# Altium PCB keyboard.PcbDoc
Units mm, origin at the board's own origin, x right, y up, seen from the top; angles counter-clockwise.
Board outline 152.4 x 101.6 mm, 4 copper layers (Top Layer, Inner, GND, Bottom Layer), stack 1.666 mm thick; 157 components, 115 nets, 357 pads, 0 vias.
Unrouted connection lines stored in the file: 243.
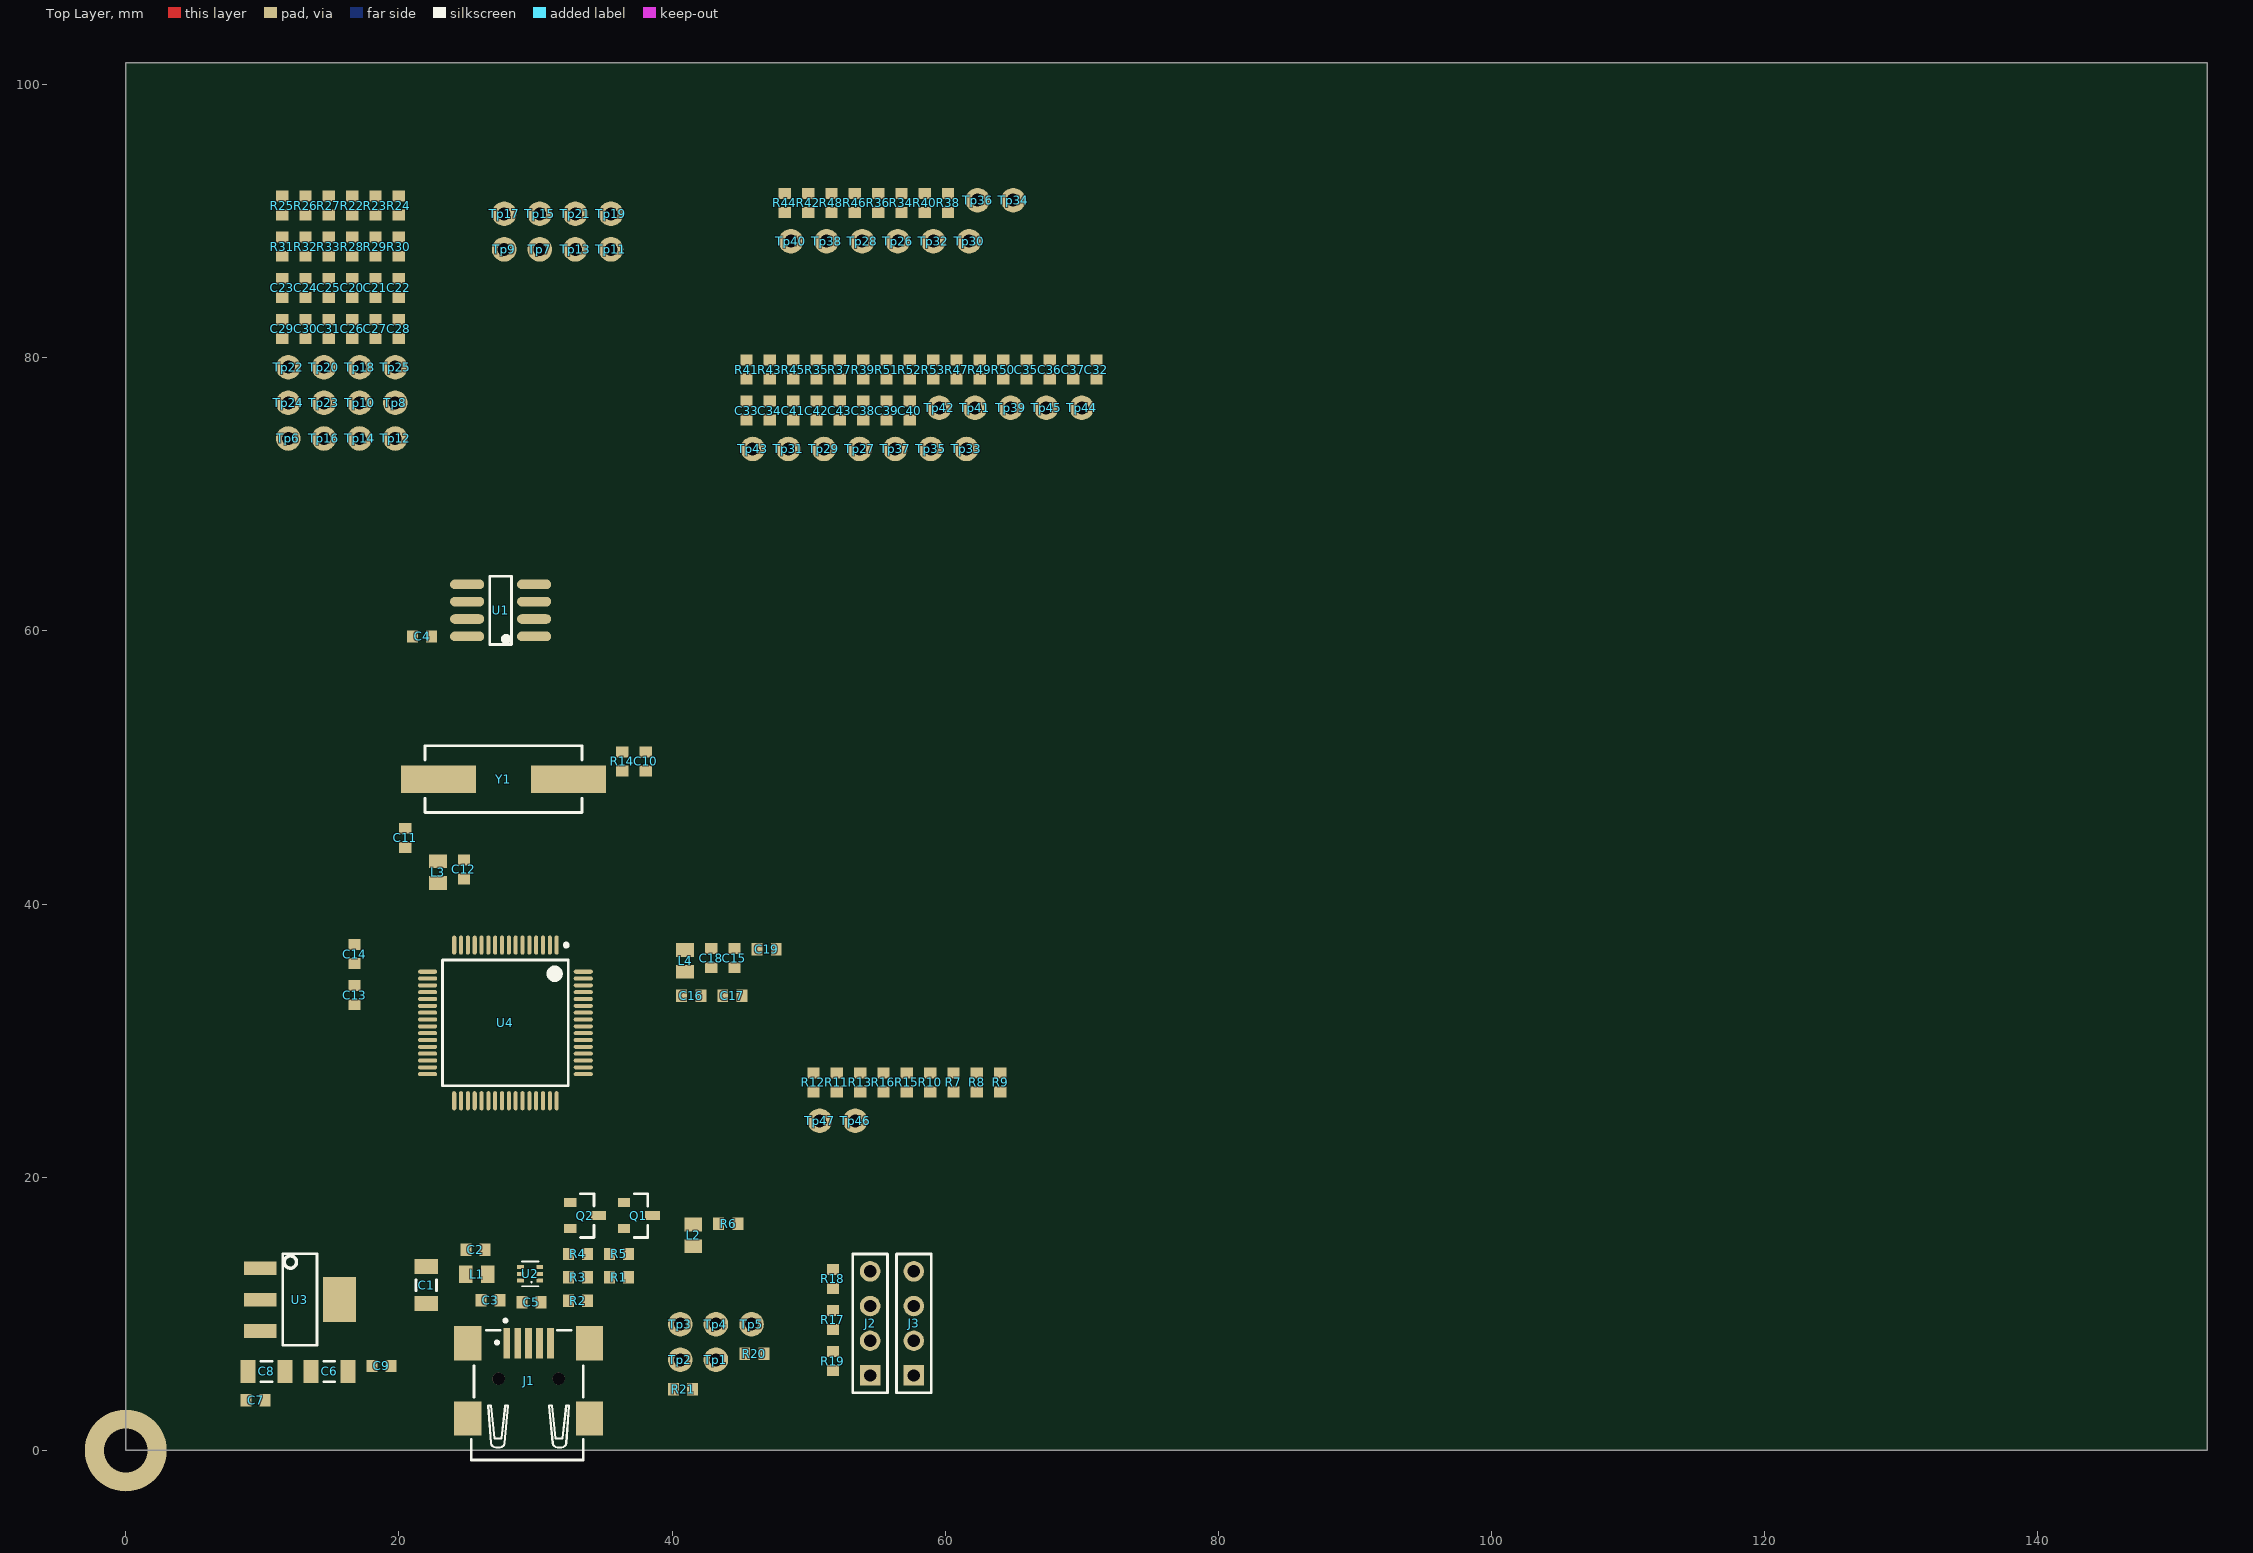
[diagram p0: Top Layer view]
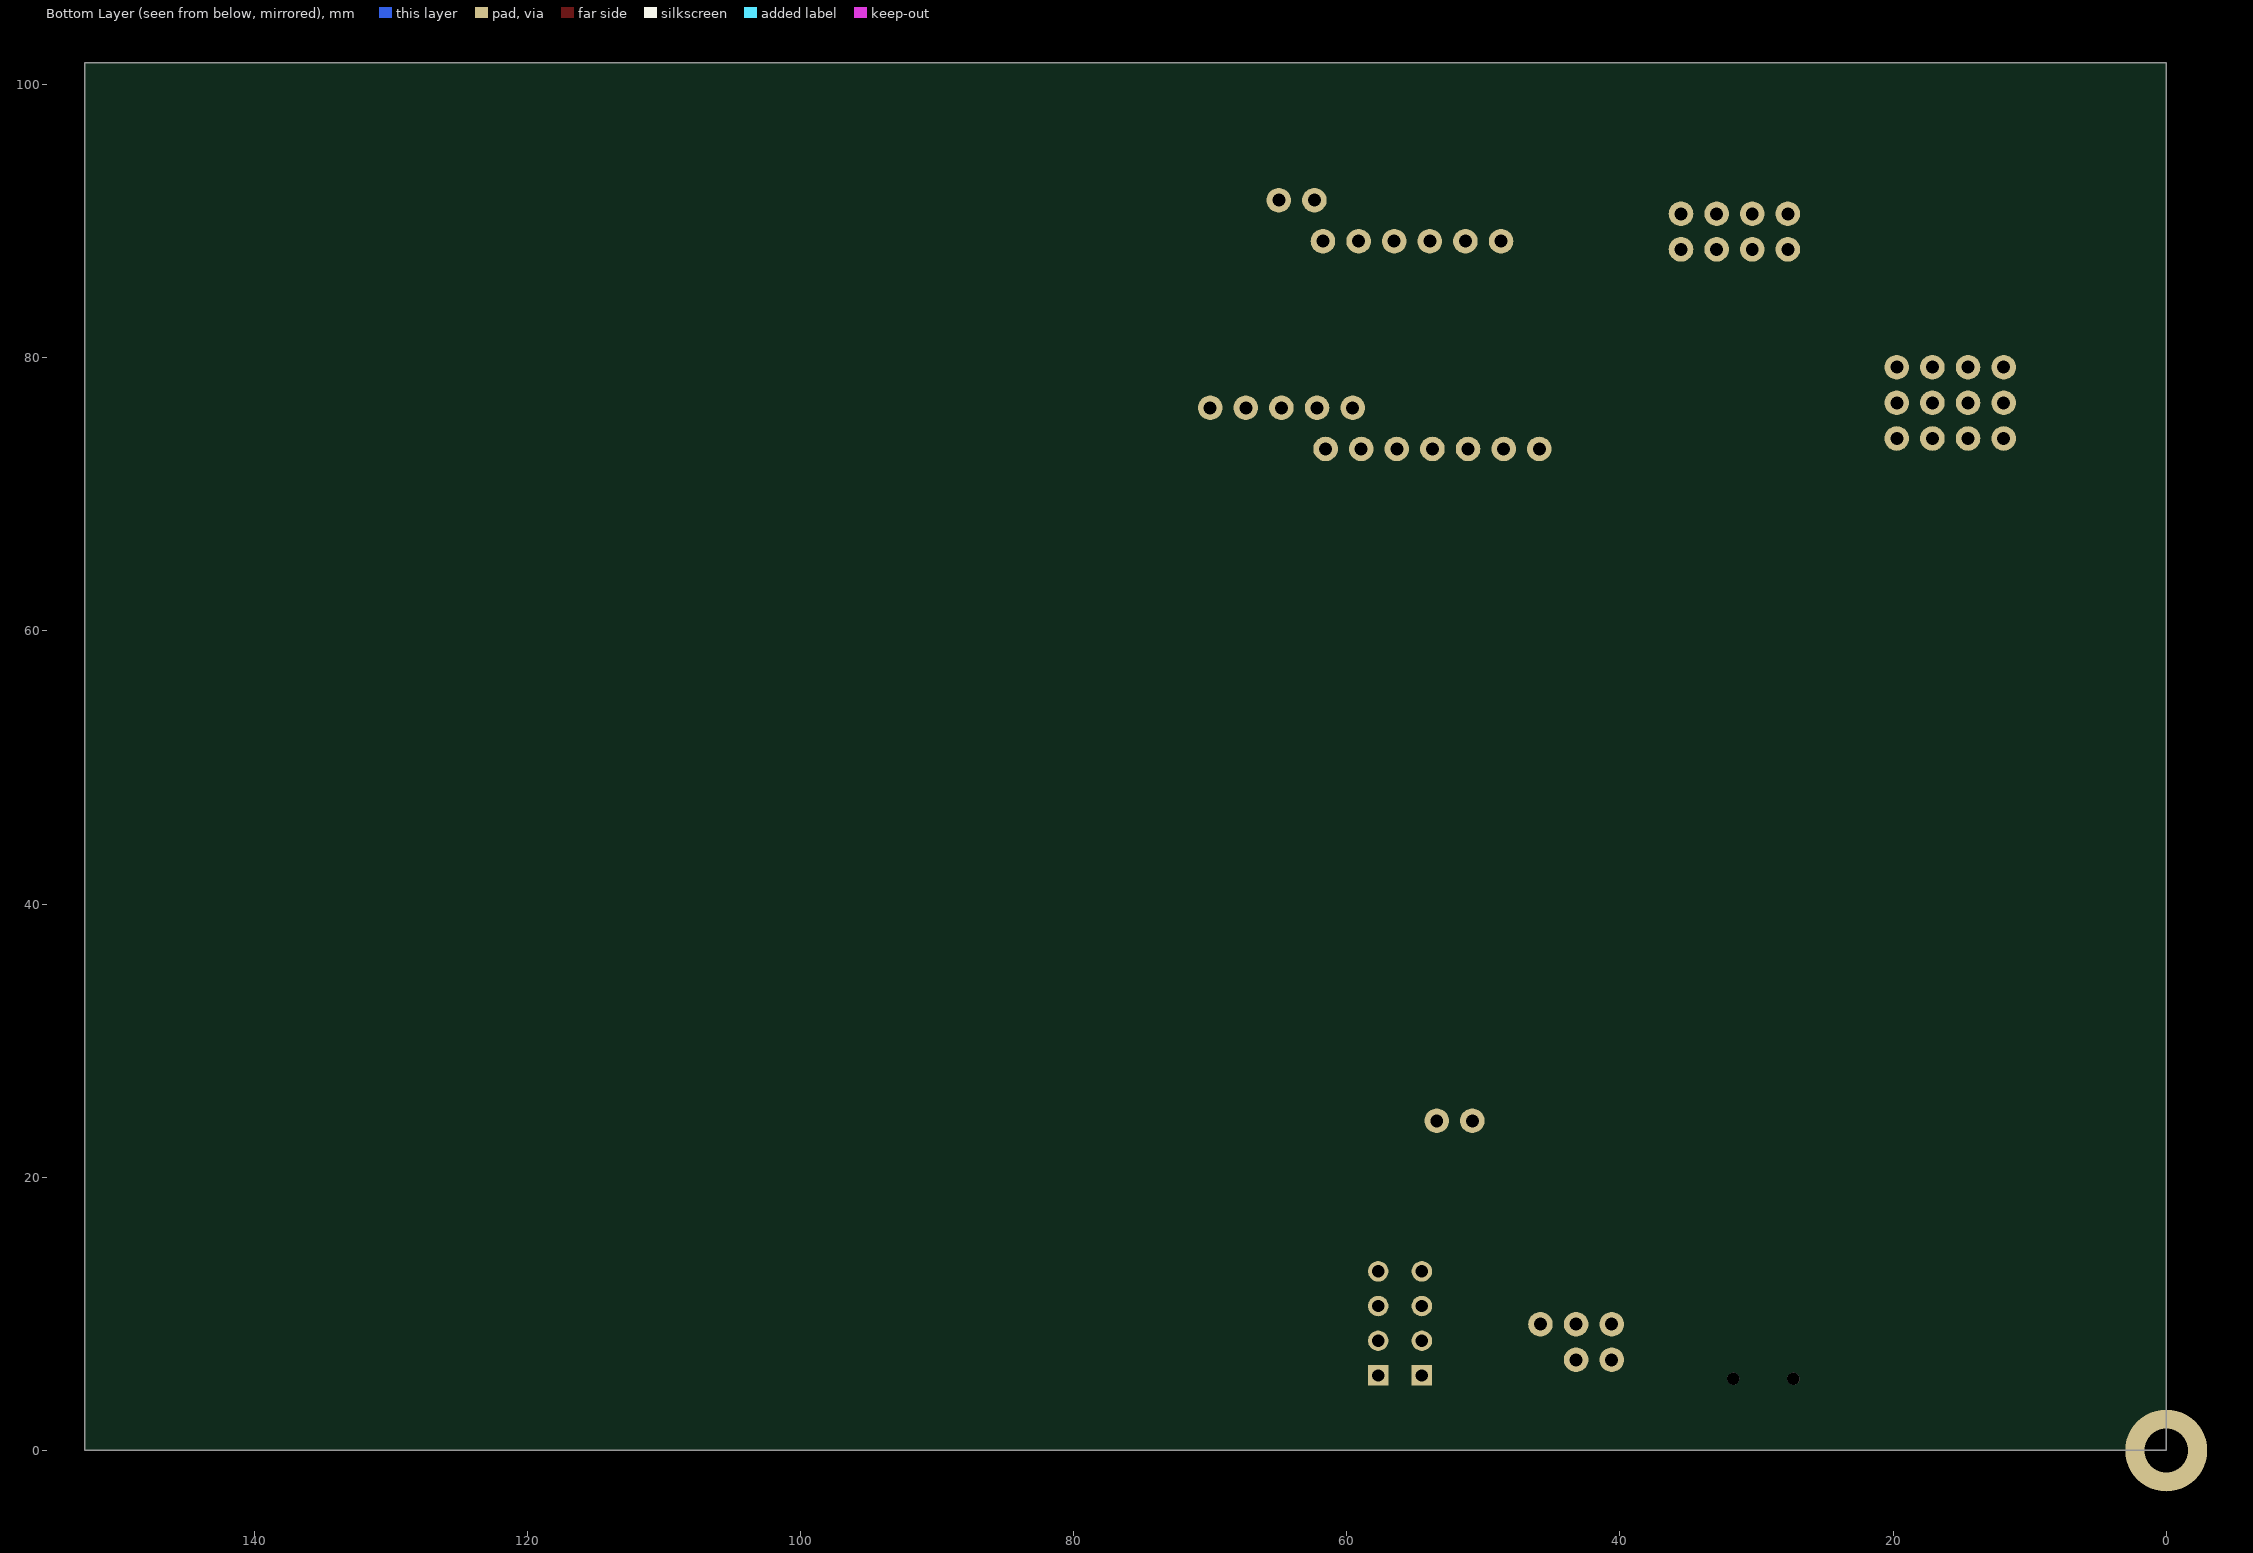
[diagram p1: Bottom Layer view, seen from below]
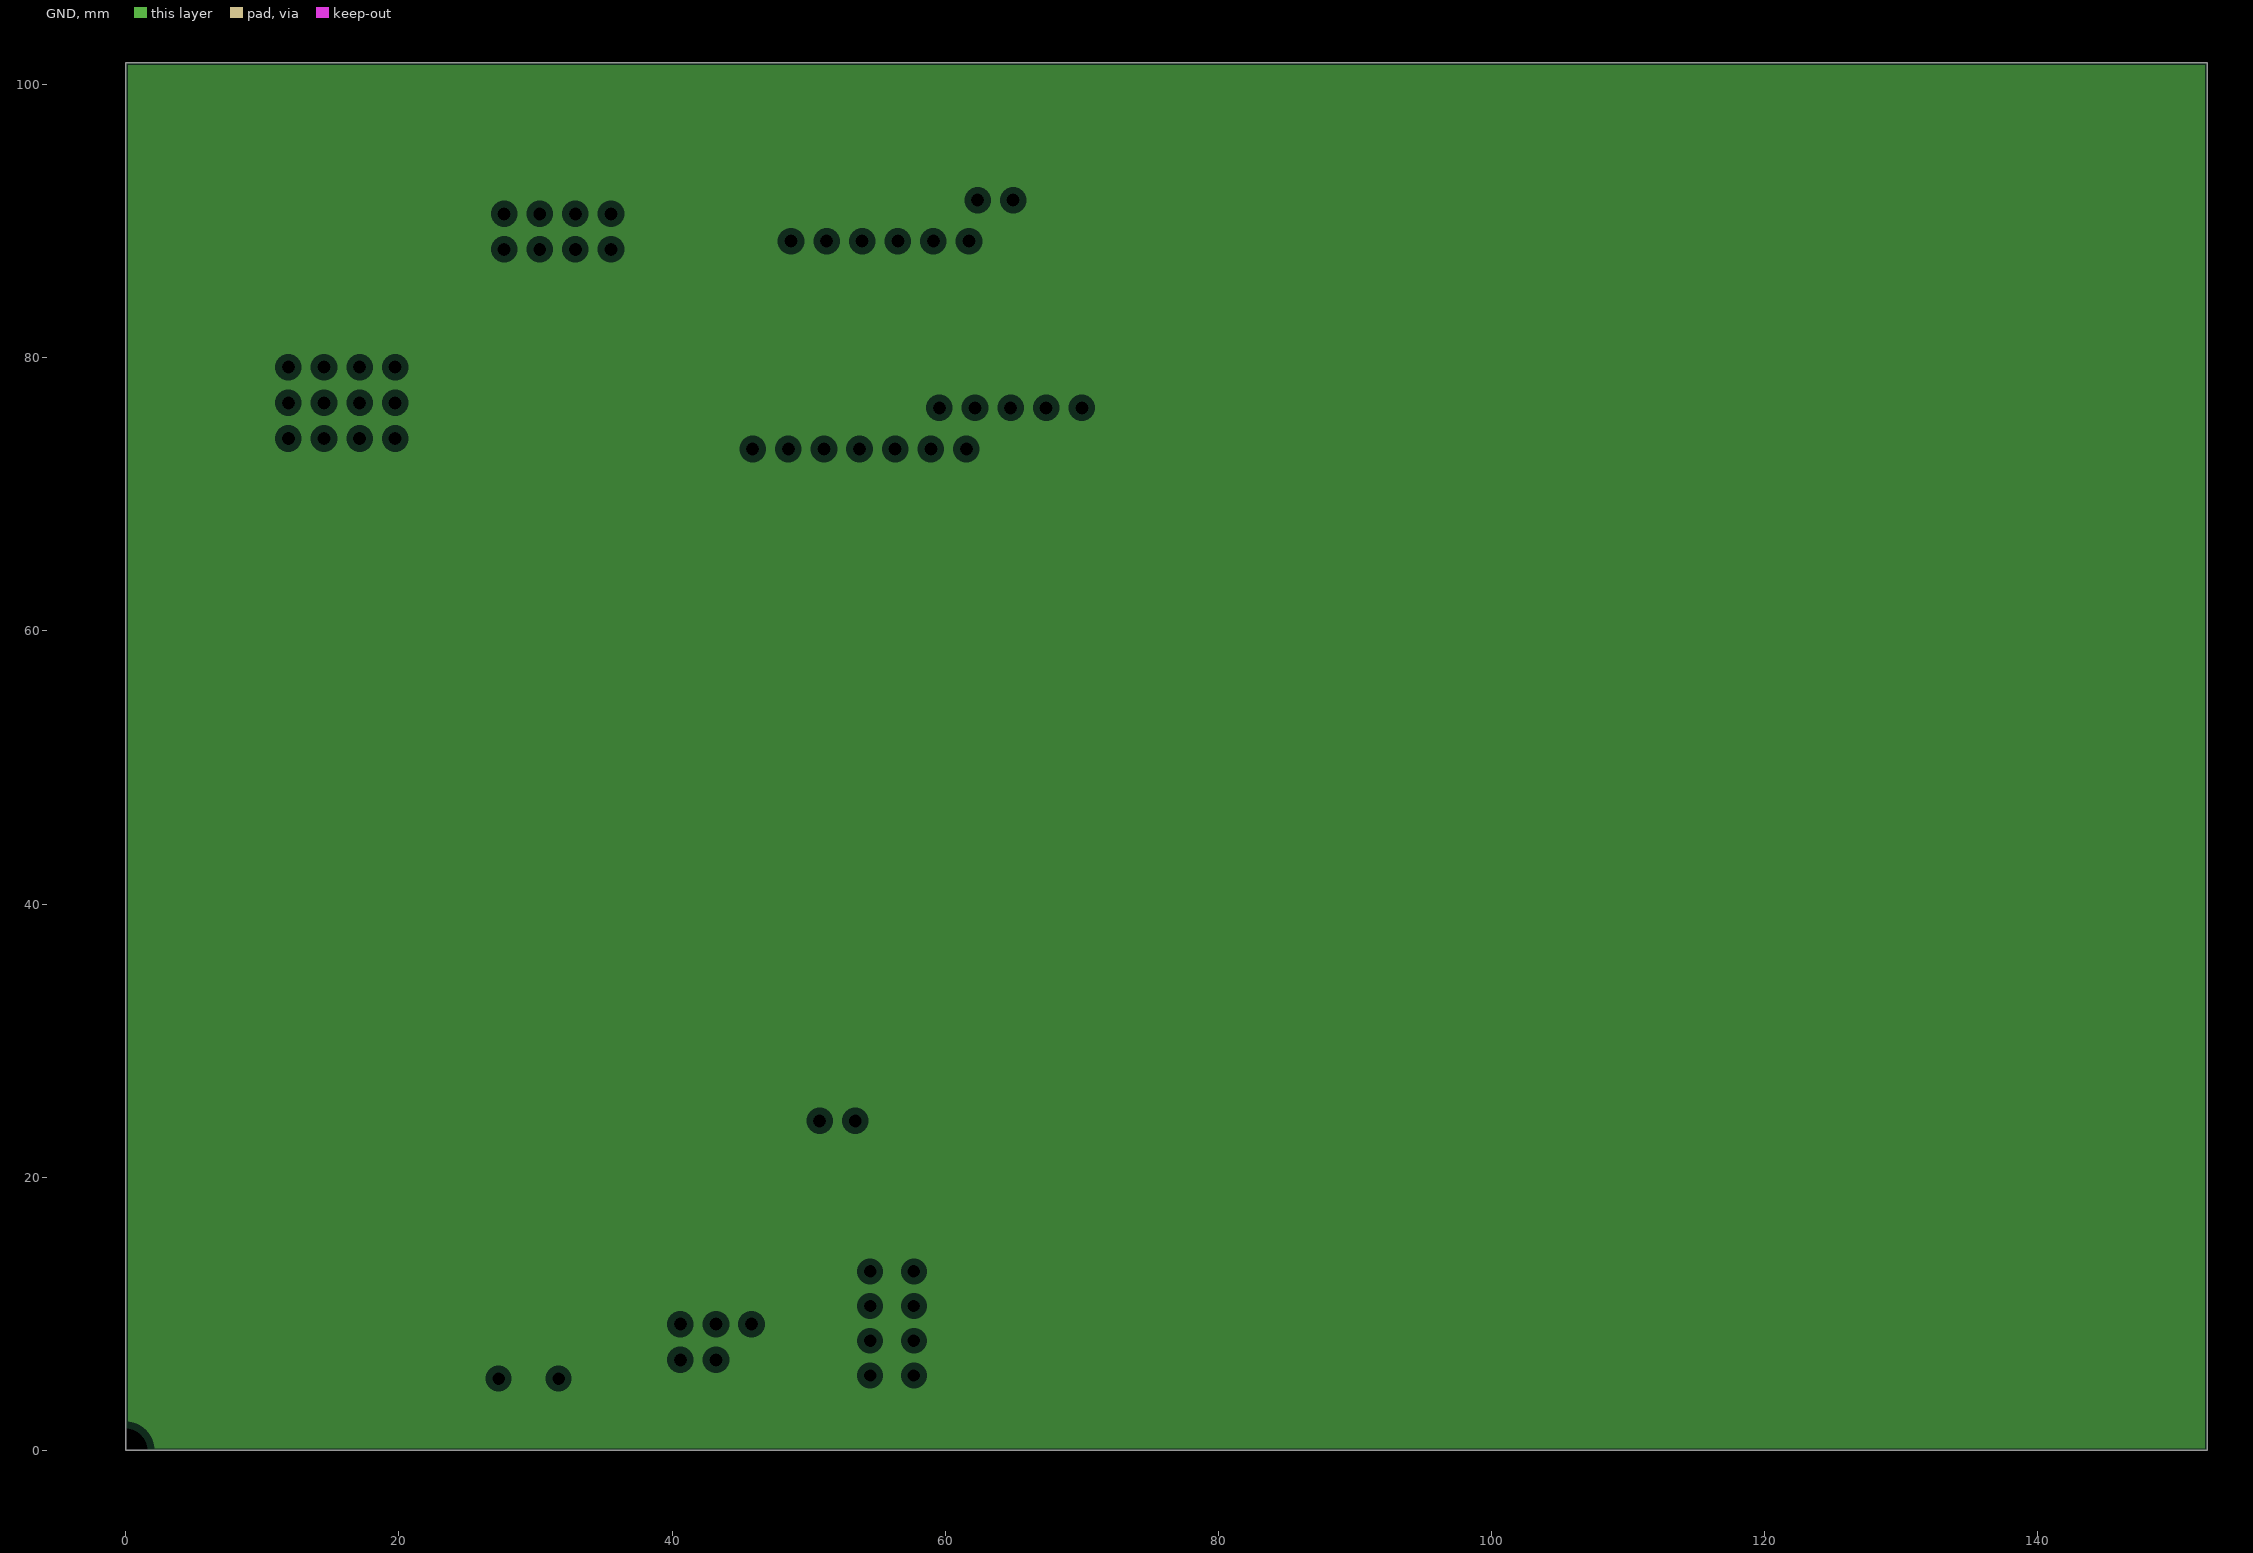
[diagram p2: GND, clearances drawn from the general rule]

## Layer stack, top to bottom
Top Solder: solder mask 0.0102, Solder Resist, Dk 3.5
Top Layer: signal copper 0.035
Dielectric1: prepreg 0.408, 2x7628, Dk 4.2
Inner: signal copper 0.035
Dielectric2: core 0.71, FR-4, Dk 4.2
GND: plane copper 0.035
Dielectric3: prepreg 0.408, 2x7628, Dk 4.2
Bottom Layer: signal copper 0.035
Bottom Solder: solder mask 0.0102, Solder Resist, Dk 3.5

## Board outline
0,0 152.4,0 152.4,101.6 0,101.6

## Design rules (kind name [scope] priority, off if disabled: settings)
Clearance Clearance_comp [InComponent('U4')] p1: gap=0.15
Clearance [All] p2: gap=0.25
DiffPairsRouting [All] p1: maxlimit=0.254 minlimit=0.254 mostfreqgap=0.254 toplayer_minwidth=0.381 toplayer_maxwidth=0.381 toplayer_prefwidth=0.381 midlayer2_minwidth=0.381 midlayer2_maxwidth=0.381 midlayer2_prefwidth=0.381 bottomlayer_minwidth=0.381 bottomlayer_maxwidth=0.381 bottomlayer_prefwidth=0.381 maxuncoupledlength=12.7
PlaneClearance [All] p1: clearance=0.5
PlaneConnect PlaneConnect_via [isvia] p1: planeconnectstyle=Direct reliefexpansion=0.508 reliefentries=4 reliefconductorwidth=0.254 reliefairgap=0.254
PlaneConnect [All] p2: planeconnectstyle=Relief reliefexpansion=0.508 reliefentries=4 reliefconductorwidth=0.254 reliefairgap=0.254
PolygonConnect PolygonConnect_via [isvia] p1: connectstyle=Direct reliefconductorwidth=0.254 reliefentries=4 polygonreliefangle="90 Angle" airgapwidth=0.254
PolygonConnect [All] p2: connectstyle=Relief reliefconductorwidth=0.254 reliefentries=4 polygonreliefangle="90 Angle" airgapwidth=0.254
RoutingVias [All] p1: holewidth=0.3 width=0.6 viastyle="Through Hole" minholewidth=0.2 minwidth=0.35 maxholewidth=0.5 maxwidth=1
SolderMaskExpansion SolderMaskExpansion_via [IsVia] p1: expansion=-10
SolderMaskExpansion [All] p2: expansion=0.1
Width [All] p1: maxlimit=5 minlimit=0.15 preferedwidth=0.25
27 further rules are at their usual default settings.

## Classes and differential pairs
net class usb_diff: USB_N USB_P
net class Power: +3.3V +5V VDD
differential pair USB: +USB_P -USB_N

## Components (designator, comment, footprint, x,y, rotation, side; value= is the part's Value field where it differs from the comment)
C1 "4.7uF" 1206_[3216] 22,12.1 r270 top
C2 "100nF" 0603_[1608] 25.6,14.7 r0 top
C3 "10nF" 0603_[1608] 26.7,11 r180 top
C4 "100nF" 0603_[1608] 21.7,59.6 r180 top
C5 "100nF" 0603_[1608] 29.704,10.857 r0 top
C6 "10uF" 1206_[3216] 14.912,5.784 r0 top
C7 "100nF" 0603_[1608] 9.504,3.676 r0 top
C8 "10uF" 1206_[3216] 10.304,5.784 r0 top
C9 "100nF" 0603_[1608] 18.72,6.184 r0 top
C10 "27pF" 0603_[1608] 38.07,50.442 r90 top
C11 "27pF" 0603_[1608] 20.454,44.854 r90 top
C12 "1uF" 0603_[1608] 24.762,42.542 r90 top
C13 "2.2uF" 0603_[1608] 16.754,33.334 r90 top
C14 "2.2uF" 0603_[1608] 16.754,36.342 r90 top
C15 "100nF" 0603_[1608] 44.57,36.042 r90 top
C16 "100nF" 0603_[1608] 41.404,33.284 r180 top
C17 "100nF" 0603_[1608] 44.412,33.284 r180 top
C18 "100nF" 0603_[1608] 42.862,36.042 r90 top
C19 "4.7uF" 0603_[1608] 46.928,36.692 r0 top
C20 "100nF" 0603_[1608] 16.578,85.126 r90 top
C21 "100nF" 0603_[1608] 18.286,85.126 r90 top
C22 "100nF" 0603_[1608] 19.994,85.126 r90 top
C23 "100nF" 0603_[1608] 11.454,85.126 r90 top
C24 "100nF" 0603_[1608] 13.162,85.126 r90 top
C25 "100nF" 0603_[1608] 14.87,85.126 r90 top
C26 "100nF" 0603_[1608] 16.578,82.117 r90 top
C27 "100nF" 0603_[1608] 18.286,82.117 r90 top
C28 "100nF" 0603_[1608] 19.994,82.117 r90 top
C29 "100nF" 0603_[1608] 11.454,82.117 r90 top
C30 "100nF" 0603_[1608] 13.162,82.117 r90 top
C31 "100nF" 0603_[1608] 14.87,82.117 r90 top
C32 "100nF" 0603_[1608] 71.074,79.142 r90 top
C33 "100nF" 0603_[1608] 45.454,76.134 r90 top
C34 "100nF" 0603_[1608] 47.162,76.134 r90 top
C35 "100nF" 0603_[1608] 65.95,79.142 r90 top
C36 "100nF" 0603_[1608] 67.658,79.142 r90 top
C37 "100nF" 0603_[1608] 69.366,79.142 r90 top
C38 "100nF" 0603_[1608] 53.994,76.134 r90 top
C39 "100nF" 0603_[1608] 55.702,76.134 r90 top
C40 "100nF" 0603_[1608] 57.41,76.134 r90 top
C41 "100nF" 0603_[1608] 48.87,76.134 r90 top
C42 "100nF" 0603_[1608] 50.578,76.134 r90 top
C43 "100nF" 0603_[1608] 52.286,76.134 r90 top
J1 "Mini USB Type B" usb_typeB_mini_smd 29.5,5.1 r0 top
J2 "SWD" HEADER_1X4_2.54MM_THD 54.5,9.3 r90 top
J3 "PCB Conn" HEADER_1X4_2.54MM_THD 57.7,9.3 r90 top
L1 "220 ohm @ 100MHz" 0805_[2012] 25.7,12.9 r0 top
L2 "220 ohm @ 100MHz" 0805_[2012] 41.554,15.742 r90 top
L3 "220 ohm @ 100MHz" 0805_[2012] 22.854,42.342 r270 top
L4 "220 ohm @ 100MHz" 0805_[2012] 40.954,35.842 r90 top
Q1 "BC817" SOT-23 37.524,17.192 r0 top
Q2 "BC817" SOT-23 33.591,17.192 r0 top
R1 "10k" 0603_[1608] 36.112,12.676 r0 top
R2 "47k" 0603_[1608] 33.104,10.968 r0 top
R3 "1k" 0603_[1608] 33.104,12.676 r0 top
R4 "33k" 0603_[1608] 33.104,14.384 r0 top
R5 "1k5" 0603_[1608] 36.112,14.384 r0 top
R6 "100K" 0603_[1608] 44.112,16.592 r0 top
R7 "33R" 0603_[1608] 60.602,26.942 r90 top
R8 "10K" 0603_[1608] 62.31,26.942 r90 top
R9 "33R" 0603_[1608] 64.018,26.942 r90 top
R10 "10K" 0603_[1608] 58.894,26.942 r90 top
R11 "10K" 0603_[1608] 52.062,26.942 r90 top
R12 "33R" 0603_[1608] 50.354,26.942 r90 top
R13 "33R" 0603_[1608] 53.77,26.942 r90 top
R14 "1M" 0603_[1608] 36.362,50.442 r90 top
R15 "10K" 0603_[1608] 57.186,26.942 r90 top
R16 "10K" 0603_[1608] 55.478,26.942 r90 top
R17 "33R" 0603_[1608] 51.776,9.553 r90 top
R18 "33R" 0603_[1608] 51.776,12.561 r90 top
R19 "33R" 0603_[1608] 51.776,6.545 r90 top
R20 "680R" 0603_[1608] 46.02,7.084 r0 top
R21 "180R" 0603_[1608] 40.804,4.476 r0 top
R22 "33R" 0603_[1608] 16.578,91.142 r90 top
R23 "33R" 0603_[1608] 18.286,91.142 r90 top
R24 "33R" 0603_[1608] 19.994,91.142 r90 top
R25 "33R" 0603_[1608] 11.454,91.142 r90 top
R26 "33R" 0603_[1608] 13.162,91.142 r90 top
R27 "33R" 0603_[1608] 14.87,91.142 r90 top
R28 "33R" 0603_[1608] 16.578,88.134 r90 top
R29 "33R" 0603_[1608] 18.286,88.134 r90 top
R30 "33R" 0603_[1608] 19.994,88.134 r90 top
R31 "33R" 0603_[1608] 11.454,88.134 r90 top
R32 "33R" 0603_[1608] 13.162,88.134 r90 top
R33 "33R" 0603_[1608] 14.87,88.134 r90 top
R34 "390R" 0603_[1608] 56.794,91.342 r90 top
R35 "33R" 0603_[1608] 50.578,79.142 r90 top
R36 "390R" 0603_[1608] 55.086,91.342 r90 top
R37 "33R" 0603_[1608] 52.286,79.142 r90 top
R38 "390R" 0603_[1608] 60.21,91.342 r90 top
R39 "33R" 0603_[1608] 53.994,79.142 r90 top
R40 "390R" 0603_[1608] 58.502,91.342 r90 top
R41 "33R" 0603_[1608] 45.454,79.142 r90 top
R42 "390R" 0603_[1608] 49.962,91.342 r90 top
R43 "33R" 0603_[1608] 47.162,79.142 r90 top
R44 "390R" 0603_[1608] 48.254,91.342 r90 top
R45 "33R" 0603_[1608] 48.87,79.142 r90 top
R46 "390R" 0603_[1608] 53.378,91.342 r90 top
R47 "33R" 0603_[1608] 60.826,79.142 r90 top
R48 "390R" 0603_[1608] 51.67,91.342 r90 top
R49 "33R" 0603_[1608] 62.534,79.142 r90 top
R50 "33R" 0603_[1608] 64.242,79.142 r90 top
R51 "33R" 0603_[1608] 55.702,79.142 r90 top
R52 "33R" 0603_[1608] 57.41,79.142 r90 top
R53 "33R" 0603_[1608] 59.118,79.142 r90 top
Tp1 "+3.3V" TEST_POINT_THD_D1.8MM 43.212,6.634 r0 top
Tp2 "+5V" TEST_POINT_THD_D1.8MM 40.604,6.634 r0 top
Tp3 "GND" TEST_POINT_THD_D1.8MM 40.604,9.242 r0 top
Tp4 "GND" TEST_POINT_THD_D1.8MM 43.212,9.242 r0 top
Tp5 "Vusb" TEST_POINT_THD_D1.8MM 45.82,9.242 r0 top
Tp6 "PB0-KC0" TEST_POINT_THD_D1.8MM 11.904,74.093 r90 top
Tp7 "PC8-LC0" TEST_POINT_THD_D1.8MM 30.312,87.934 r90 top
Tp8 "PB1-KC1" TEST_POINT_THD_D1.8MM 19.728,76.701 r90 top
Tp9 "PC9-LC1" TEST_POINT_THD_D1.8MM 27.704,87.934 r90 top
Tp10 "PB3-KC2" TEST_POINT_THD_D1.8MM 17.12,76.701 r90 top
Tp11 "PC10-LC2" TEST_POINT_THD_D1.8MM 35.528,87.934 r180 top
Tp12 "PB4-KC3" TEST_POINT_THD_D1.8MM 19.728,74.093 r90 top
Tp13 "PC12-LC3" TEST_POINT_THD_D1.8MM 32.92,87.934 r180 top
Tp14 "PB5-KC4" TEST_POINT_THD_D1.8MM 17.12,74.093 r90 top
Tp15 "PC13-LC4" TEST_POINT_THD_D1.8MM 30.312,90.542 r180 top
Tp16 "PB6-KC5" TEST_POINT_THD_D1.8MM 14.512,74.093 r90 top
Tp17 "PC14-LC5" TEST_POINT_THD_D1.8MM 27.704,90.542 r180 top
Tp18 "PB7-KC6" TEST_POINT_THD_D1.8MM 17.12,79.309 r90 top
Tp19 "PC15-LC6" TEST_POINT_THD_D1.8MM 35.528,90.542 r180 top
Tp20 "PB8-KC7" TEST_POINT_THD_D1.8MM 14.512,79.309 r90 top
Tp21 "PB15-LC7" TEST_POINT_THD_D1.8MM 32.92,90.542 r180 top
Tp22 "PB9-KC8" TEST_POINT_THD_D1.8MM 11.904,79.309 r90 top
Tp23 "PB12-KC9" TEST_POINT_THD_D1.8MM 14.512,76.701 r180 top
Tp24 "PB13-KC10" TEST_POINT_THD_D1.8MM 11.904,76.701 r180 top
Tp25 "PB14-KC11" TEST_POINT_THD_D1.8MM 19.728,79.309 r180 top
Tp26 "PC0-LR0" TEST_POINT_THD_D1.8MM 56.528,88.534 r90 top
Tp27 "PA0-KR0" TEST_POINT_THD_D1.8MM 53.728,73.326 r90 top
Tp28 "PC1-LR1" TEST_POINT_THD_D1.8MM 53.92,88.534 r90 top
Tp29 "PA1-KR1" TEST_POINT_THD_D1.8MM 51.12,73.326 r90 top
Tp30 "PC2-LR2" TEST_POINT_THD_D1.8MM 61.744,88.534 r90 top
Tp31 "PA4-KR2" TEST_POINT_THD_D1.8MM 48.512,73.326 r90 top
Tp32 "PC3-LR3" TEST_POINT_THD_D1.8MM 59.136,88.534 r90 top
Tp33 "PA5-KR3" TEST_POINT_THD_D1.8MM 61.552,73.326 r90 top
Tp34 "PC4-LR4" TEST_POINT_THD_D1.8MM 64.976,91.542 r90 top
Tp35 "PA6-KR4" TEST_POINT_THD_D1.8MM 58.944,73.326 r90 top
Tp36 "PC5-LR5" TEST_POINT_THD_D1.8MM 62.368,91.542 r90 top
Tp37 "PA7-KR5" TEST_POINT_THD_D1.8MM 56.336,73.326 r90 top
Tp38 "PC6-LR6" TEST_POINT_THD_D1.8MM 51.312,88.534 r90 top
Tp39 "PA8-KR6" TEST_POINT_THD_D1.8MM 64.784,76.334 r90 top
Tp40 "PC7-LR7" TEST_POINT_THD_D1.8MM 48.704,88.534 r90 top
Tp41 "PA9-KR7" TEST_POINT_THD_D1.8MM 62.176,76.334 r90 top
Tp42 "PA10-KR8" TEST_POINT_THD_D1.8MM 59.568,76.334 r180 top
Tp43 "PA13-KR9" TEST_POINT_THD_D1.8MM 45.904,73.326 r180 top
Tp44 "PA14-KR10" TEST_POINT_THD_D1.8MM 70,76.334 r180 top
Tp45 "PA15-KR11" TEST_POINT_THD_D1.8MM 67.392,76.334 r180 top
Tp46 "PA2-C0" TEST_POINT_THD_D1.8MM 53.412,24.134 r90 top
Tp47 "PA3-R0" TEST_POINT_THD_D1.8MM 50.804,24.134 r90 top
U1 "24C128" SOIC8 27.446,61.508 r180 top
U2 "TVS Array (WE 82400152)" SOT-563 29.61,12.928 r90 top
U3 "LM1117xxx-3.3" SOT-223 12.754,11.042 r0 top
U4 "STM32F103RB" TSQFP50P1200X1200X160-64N 27.8,31.3 r270 top
Y1 "8MHz" CRYSTAL_HC49UP 27.654,49.152 r180 top

## Footprints (in the part's own frame and the unit in brackets; to place one, negate y for a bottom-side part, rotate by r counter-clockwise, add the part's x,y. Pads: shape width x height; smd on the part's side, far side on the other; paste and mask are expansions set on the pad)
0603_[1608] [mm] "Chip Capacitor, Body 1.6x0.8mm, IPC High Density"
  rect 0.8x0.9 smd: 1(-0.7,0) 2(0.7,0)
  body extent -0.75,-0.4 0.75,0.4, height 0.67
0805_[2012] [mm] "Chip Resistor, Body 2.0x1.2mm, IPC High Density"
  rect 1x1.3 smd: 1(-0.8,0) 2(0.8,0)
  body extent -1,-0.6 1,0.6, height 0.62
1206_[3216] [mm] "Chip Capacitor, Body 3.2x1.6mm, IPC High Density"
  rect 1.1x1.7 smd: 1(-1.35,0) 2(1.35,0)
  silkscreen extent -0.4,-0.75 0.4,0.75, body extent -1.7,-0.9 1.7,0.9, height 1.3
CRYSTAL_HC49UP [mil]
  rect 216.53x78.73 smd: 1(-187,0) 2(187,0)
  silkscreen extent -226,-96 226,96, body extent -295,-89 295,89, height 99
HEADER_1X4_2.54MM_THD [mm] "Connector; Header; 4 Position"
  rect 1.5x1.5 hole 0.9: 1(-3.81,0)
  round 1.5 hole 0.9: 2(-1.27,0) 3(1.27,0) 4(3.81,0)
  silkscreen extent -5.08,-1.27 5.08,1.27, body extent -5.08,-1.25 4.98,1.25, height 8.2
SOIC8 [mm] "SOIC, 8-Leads, Body 4.9x3.8mm, Pitch 1.27mm, IPC Low Density"
  oval 2.5x0.7 smd: 1(-2.45,1.905) 2(-2.45,0.635) 3(-2.45,-0.635) 4(-2.45,-1.905) 5(2.45,-1.905) 6(2.45,-0.635) 7(2.45,0.635) 8(2.45,1.905)
  silkscreen extent -0.8,-2.5 0.8,2.5, body extent -2,-2.5 2,2.5, height 1.75
SOT-23 [mm] "SOT23, 3-Leads, Body 2.9x1.3mm, Pitch 0.95mm, Lead Span 2.5mm, IPC High Density"
  rect 0.9x0.65 smd: 1(-1.038,0.95) 2(-1.038,-0.95)
  rect 1.1x0.65 smd: 3(1.038,0)
  silkscreen extent -0.3,-1.6 0.7,1.6, body extent -1.2,-1.52 1.2,1.52, height 1.22
SOT-223 [mm] "SOT223, 4-Leads, Body 6.5x3.5mm, Pitch 2.3mm, Lead Span 7mm, IPC Medium Density"
  rect 2.4x1 smd: 1(-2.9,2.3) 2(-2.9,0) 3(-2.9,-2.3)
  rect 2.4x3.3 smd: 4(2.9,0)
  silkscreen extent -1.25,-3.35 1.25,3.35, body extent -1.85,-3.35 1.85,3.35, height 1.8
SOT-563 [mm]
  rect 0.3x0.5 smd: 1(-0.5,-0.7) 2(0,-0.7) 3(0.5,-0.7) 4(0.5,0.7) 5(0,0.7) 6(-0.5,0.7)
  silkscreen extent -0.9,-0.61 0.9,0.6, body extent -0.8,-0.79 0.8,0.81, height 0.55
TEST_POINT_THD_D1.8MM [mm] "Test point D=1.6MM"
  round 1.8 hole 0.95 paste-10 mask+0.05: 1(0,0)
TSQFP50P1200X1200X160-64N [mm] "TSQFP, 64-Leads, Body 10,00x10,00mm, Pitch 0,50mm, IPC Medium Density"
  oval 1.4x0.3 smd: 1(-5.7,3.75) 2(-5.7,3.25) 3(-5.7,2.75) 4(-5.7,2.25) 5(-5.7,1.75) 6(-5.7,1.25) 7(-5.7,0.75) 8(-5.7,0.25) 9(-5.7,-0.25) 10(-5.7,-0.75) 11(-5.7,-1.25) 12(-5.7,-1.75) 13(-5.7,-2.25) 14(-5.7,-2.75) 15(-5.7,-3.25) 16(-5.7,-3.75) 33(5.7,-3.75) 34(5.7,-3.25) 35(5.7,-2.75) 36(5.7,-2.25) 37(5.7,-1.75) 38(5.7,-1.25) 39(5.7,-0.75) 40(5.7,-0.25) 41(5.7,0.25) 42(5.7,0.75) 43(5.7,1.25) 44(5.7,1.75) 45(5.7,2.25) 46(5.7,2.75) 47(5.7,3.25) 48(5.7,3.75)
  oval 0.3x1.4 smd: 17(-3.75,-5.7) 18(-3.25,-5.7) 19(-2.75,-5.7) 20(-2.25,-5.7) 21(-1.75,-5.7) 22(-1.25,-5.7) 23(-0.75,-5.7) 24(-0.25,-5.7) 25(0.25,-5.7) 26(0.75,-5.7) 27(1.25,-5.7) 28(1.75,-5.7) 29(2.25,-5.7) 30(2.75,-5.7) 31(3.25,-5.7) 32(3.75,-5.7) 49(3.75,5.7) 50(3.25,5.7) 51(2.75,5.7) 52(2.25,5.7) 53(1.75,5.7) 54(1.25,5.7) 55(0.75,5.7) 56(0.25,5.7) 57(-0.25,5.7) 58(-0.75,5.7) 59(-1.25,5.7) 60(-1.75,5.7) 61(-2.25,5.7) 62(-2.75,5.7) 63(-3.25,5.7) 64(-3.75,5.7)
  silkscreen extent -5.82,-4.6 4.6,4.6, body extent -5,-5 5,5, height 1.6
usb_typeB_mini_smd [mm] "5 pins"
  rect 0.5x2.25 smd: 1(-1.6,2.75) 2(-0.8,2.75) 3(0,2.75) 4(0.8,2.75) 5(1.6,2.75)
  rect 2x2.5 smd: Z1(-4.45,2.75) Z2(4.45,2.75) Z3(4.45,-2.75) Z4(-4.45,-2.75)
  round 0.9 hole 0.9 unplated: ""(-2.2,0.15) ""(2.2,0.15)
  silkscreen extent -4.2,-5.8 4,4.52, body extent -4.8,-5.75 4.8,3.5, height 3.97

## Part data
C1: library part "Cap Pol1", "Ceramic X7R 16V"
C2 C3 C4 C5 C7 C9 C15 C16 C17 C18 C20 C21 C22 C23 C24 C25 C26 C27 C28 C29 C30 C31 C32 C33 C34 C35 C36 C37 C38 C39 C40 C41 C42 C43: library part Cap, "Ceramic X7R 50V"
C6 C8: library part "Cap Pol1", "Ceramic X5R 25V"
C10 C11: library part Cap, "Ceramic NP0 +/- 0.1"
C12 C19: library part Cap, "Ceramic X7R 16V"
C13 C14: library part Cap, "Ceramic 6.3V X7R"
J1: library part USB_Con_Type_B_mini_SMT, "Mini USB SMT Type B 5 Contacts"
J2 J3: library part "Header 4", "Pin Header, 1x4, 2.54mm."
L1 L2 L4: library part Inductor, "WE 742792022"
L3: library part Inductor, "Inductor"
Q1 Q2: "BJT NPN"
R1 R2 R3 R4 R5 R7 R8 R9 R10 R11 R12 R13 R14 R15 R16 R17 R18 R19 R20 R21 R22 R23 R24 R25 R26 R27 R28 R29 R30 R31 R32 R33 R34 R35 R36 R37 R38 R39 R40 R41 R42 R43 R44 R45 R46 R47 R48 R49 R50 R51 R52 R53: library part Res1, "Resistor"
R6: library part Resistor_ST, "Resistor"
Tp1 Tp2 Tp3 Tp4 Tp5 Tp6 Tp7 Tp8 Tp9 Tp10 Tp11 Tp12 Tp13 Tp14 Tp15 Tp16 Tp17 Tp18 Tp19 Tp20 Tp21 Tp22 Tp23 Tp24 Tp25 Tp26 Tp27 Tp28 Tp29 Tp30 Tp31 Tp32 Tp33 Tp34 Tp35 Tp36 Tp37 Tp38 Tp39 Tp40 Tp41 Tp42 Tp43 Tp44 Tp45 Tp46 Tp47: library part Test_point, "Test point"
U1: library part EEPROM-SOIC8, "EEPROM"
U2: library part TVS_Diode_Array
U3: library part LM1117-FIXED-OUT, "LM1117 LDO Fixed output"
Y1: library part CRYSTAL-2p

## Free pads (board coordinates)
  round 6 hole 3.2: Hole(0,0)

## Nets (pads, with @x,y where several pads share a name; then routed paths per layer and width w, separated by ;. In a path a pad name is that pad's centre, name@x,y a point inside that pad or via, vN(x,y) a via of type N, cw(c..) or ccw(c..) an arc to the next point about the centre after c; other vN are vias at no path point)
+3.3V: C8.1 C9.2 L4.1 Q1.3 R2.1 Tp1.1 U3.2 U3.4
+5V: C1.1 C2.1 C5.2 C6.1 C7.2 L1.1 R1.1 Tp2.1 U2.5 U3.3
BOOT0: J3.2 R16.2 U4.60
DISC: R3.2 U4.52
DRX: J3.3 R9.2
DTX: J3.4 R7.2
GND: C1.2 C2.2 C3.2 C4.1 C5.1 C6.2 C7.1 C8.2 C9.1 C10.2 C11.2 C12.2 C13.1 C14.1 C15.2 C16.2 C17.2 C18.2 C19.1 J1.5 L2.1 Q2.2 R4.2 R6.2 R8.2 R16.1 R20.1 R21.1 Tp3.1 Tp4.1 U1.1 U1.2 U1.3 U1.4 U1.7 U2.2 U3.1 U4.12 U4.18 U4.63
NetC3_1: C3.1 J1.1 L1.2
NetC10_1: C10.1 R14.2 U4.5 Y1.1
NetC11_1: C11.1 R14.1 U4.6 Y1.2
NetC13_2: C13.2 U4.47
NetC14_2: C14.2 U4.31
NetC20_2: C20.2 R22.2
NetC21_2: C21.2 R23.2
NetC22_2: C22.2 R24.2
NetC23_2: C23.2 R25.2
NetC24_2: C24.2 R26.2
NetC25_2: C25.2 R27.2
NetC26_2: C26.2 R28.2
NetC27_2: C27.2 R29.2
NetC28_2: C28.2 R30.2
NetC29_2: C29.2 R31.2
NetC30_2: C30.2 R32.2
NetC31_2: C31.2 R33.2
NetC32_2: C32.2 R35.2
NetC33_2: C33.2 R37.2
NetC34_2: C34.2 R39.2
NetC35_2: C35.2 R41.2
NetC36_2: C36.2 R43.2
NetC37_2: C37.2 R45.2
NetC38_2: C38.2 R47.2
NetC39_2: C39.2 R49.2
NetC40_2: C40.2 R50.2
NetC41_2: C41.2 R51.2
NetC42_2: C42.2 R52.2
NetC43_2: C43.2 R53.2
NetD1_2: R20.2
NetD2_2: R21.2
NetD3_1: 
NetD4_1: 
NetD5_1: 
NetD6_1: 
NetD7_1: 
NetD8_1: 
NetD9_1: 
NetD10_1: 
NetD11_1: 
NetD12_1: 
NetD13_1: 
NetD14_1: 
NetJ1_4: J1.4 R6.1
NetJ1_Z1: J1.Z1 J1.Z2 J1.Z3 J1.Z4 L2.2
NetJ2_2: J2.2 R17.1
NetJ2_3: J2.3 R18.1
NetJ2_4: J2.4 R19.1
NetK1_1: R34.2
NetL3_2: L3.2 U4.13
NetQ1_1: Q1.1 Q2.3 R1.2 R4.1
NetQ1_2: Q1.2 R5.1
NetQ2_1: Q2.1 R2.2 R3.1
NetR7_1: R7.1 Tp46.1 U4.16
NetR8_1: R8.1 U4.28
NetR9_1: R9.1 Tp47.1 U4.17
NetR12_2: R12.2 U4.29
NetR13_2: R13.2 U4.30
PA0: C32.1 R35.1 Tp27.1 U4.14
PA1: C33.1 R37.1 Tp29.1 U4.15
PA4: C34.1 R39.1 Tp31.1 U4.20
PA5: C35.1 R41.1 Tp33.1 U4.21
PA6: C36.1 R43.1 Tp35.1 U4.22
PA7: C37.1 R45.1 Tp37.1 U4.23
PA8: C38.1 R47.1 Tp39.1 U4.41
PA9: C39.1 R49.1 Tp41.1 U4.42
PA10: C40.1 R50.1 Tp42.1 U4.43
PA13: C41.1 R51.1 Tp43.1 U4.46
PA14: C42.1 R52.1 Tp44.1 U4.49
PA15: C43.1 R53.1 Tp45.1 U4.50
PB0: C20.1 R22.1 Tp6.1 U4.26
PB1: C21.1 R23.1 Tp8.1 U4.27
PB3: C22.1 R24.1 Tp10.1 U4.55
PB4: C23.1 R25.1 Tp12.1 U4.56
PB5: C24.1 R26.1 Tp14.1 U4.57
PB6: C25.1 R27.1 Tp16.1 U4.58
PB7: C26.1 R28.1 Tp18.1 U4.59
PB8: C27.1 R29.1 Tp20.1 U4.61
PB9: C28.1 R30.1 Tp22.1 U4.62
PB12: C29.1 R31.1 Tp23.1 U4.33
PB13: C30.1 R32.1 Tp24.1 U4.34
PB14: C31.1 R33.1 Tp25.1 U4.35
PB15: Tp21.1 U4.36
PC0: R34.1 Tp26.1 U4.8
PC1: R36.1 Tp28.1 U4.9
PC2: R38.1 Tp30.1 U4.10
PC3: R40.1 Tp32.1 U4.11
PC4: R42.1 Tp34.1 U4.24
PC5: R44.1 Tp36.1 U4.25
PC6: R46.1 Tp38.1 U4.37
PC7: R48.1 Tp40.1 U4.38
PC8: Tp7.1 U4.39
PC9: Tp9.1 U4.40
PC10: Tp11.1 U4.51
PC12: Tp13.1 U4.53
PC13: Tp15.1 U4.2
PC14: Tp17.1 U4.3
PC15: Tp19.1 U4.4
RESET: J2.1 J3.1 R15.2 U4.7
SCL: R10.1 R12.1 U1.5
SDA: R11.1 R13.1 U1.6
SWCLK/TCK: R18.2
SWDIO/TMS: R17.2
SWO/TDO: R19.2
USB_N: J1.2 U2.1 U2.6 U4.44
USB_P: J1.3 R5.2 U2.3 U2.4 U4.45
VCC_USB: Tp5.1
VDD: C4.2 C12.1 C15.1 C16.1 C17.1 C18.1 C19.2 L3.1 L4.2 R10.2 R11.2 R15.1 U1.8 U4.1 U4.19 U4.32 U4.48 U4.64
pads on no net: J1. R36.2 R38.2 R40.2 R42.2 R44.2 R46.2 R48.2 U4.54

## Polygon pours and split planes (outlines as drawn)
no net on GND (split plane): 152.249,0.151 0.151,0.151 0.151,101.449 152.249,101.449

## Silkscreen, mask and mechanical layers (free items; w line width, h text height)
Drawing:
  circle w0.127: c0,0 r1.55
  circle w0.127: c0,0 r3
  lines w0.127: -4,0 4,0 ; 0,-4 0,4
  text "Mechanical Characteristics" at 14.9,110 h5
Assembly_top:
  text "Assembly TOP" at 14.828,109.839 h5
Assembly_bot:
  text "Assembly Bottom" at 51.828,109.839 h5
Note_top:
  text "Note TOP" at 14.828,109.839 h5
Note_bot:
  text "Note Bottom" at 51.728,109.939 h5
PCB_Note:
  drawing of 260 lines, arcs and shapes, not listed
  text "PCB Note" at 360.2,188.25 h5
  text "- Plugged Vias" at 366.2,181.25 h5
  text "Layer" at 319.923,121.9 h2
  text "Name" at 328.567,121.9 h2
  text "Material" at 345.405,121.9 h2
  text "Thickness" at 360.515,121.9 h2
  text "Constant" at 372.964,121.9 h2
  text "Board Layer Stack" at 384.5,121.9 h2
  text "1" at 319.923,117.9 h2
  text "Top Overlay" at 328.567,117.9 h2
  text "2" at 319.923,113.9 h2
  text "Top Solder" at 328.567,113.9 h2
  text "Solder Resist" at 345.405,113.9 h2
  text "0,010mm" at 360.515,113.9 h2
  text "3,5" at 372.964,113.9 h2
  text "3" at 319.923,109.9 h2
  text "Top Layer" at 328.567,109.9 h2
  text "Copper" at 345.405,109.9 h2
  text "0,035mm" at 360.515,109.9 h2
  text "4" at 319.923,105.9 h2
  text "Dielectric1" at 328.567,105.9 h2
  text "2x7628" at 345.405,105.9 h2
  text "0,408mm" at 360.515,105.9 h2
  text "4,2" at 372.964,105.9 h2
  text "5" at 319.923,101.9 h2
  text "Inner" at 328.567,101.9 h2
  text "Copper" at 345.405,101.9 h2
  text "0,035mm" at 360.515,101.9 h2
  text "6" at 319.923,97.9 h2
  text "Dielectric2" at 328.567,97.9 h2
  text "FR-4" at 345.405,97.9 h2
  text "0,710mm" at 360.515,97.9 h2
  text "4,2" at 372.964,97.9 h2
  text "7" at 319.923,93.9 h2
  text "GND" at 328.567,93.9 h2
  text "Copper" at 345.405,93.9 h2
  text "0,035mm" at 360.515,93.9 h2
  text "8" at 319.923,89.9 h2
  text "Dielectric3" at 328.567,89.9 h2
  text "2x7628" at 345.405,89.9 h2
  text "0,408mm" at 360.515,89.9 h2
  text "4,2" at 372.964,89.9 h2
  text "9" at 319.923,85.9 h2
  text "Bottom Layer" at 328.567,85.9 h2
  text "Copper" at 345.405,85.9 h2
  text "0,035mm" at 360.515,85.9 h2
  text "10" at 319.923,81.9 h2
  text "Bottom Solder" at 328.567,81.9 h2
  text "Solder Resist" at 345.405,81.9 h2
  text "0,010mm" at 360.515,81.9 h2
  text "3,5" at 372.964,81.9 h2
  text "11" at 319.923,77.9 h2
  text "Bottom Overlay" at 328.567,77.9 h2
  text "File Layer names:" at 369.5,69.5 h3.5
  text "GTO" at 371.5,66 h3
  text "Top Overlay" at 380.5,66 h3
  text "GTP" at 371.5,63 h3
  text "Top Paste" at 380.5,63 h3
  text "GTS" at 371.5,60 h3
  text "Top Solder" at 380.5,60 h3
  text "GTL" at 371.5,57 h3
  text "Top Layer" at 380.5,57 h3
  text "G1" at 371.5,54 h3
  text "Inner" at 380.5,54 h3
  text "GP1" at 371.5,51 h3
  text "GND Plane" at 380.5,51 h3
  text "GBL" at 371.5,48 h3
  text "Bottom Layer" at 380.5,48 h3
  text "GBS" at 371.5,45 h3
  text "Bottom Solder" at 380.5,45 h3
  text "GBP" at 371.5,42 h3
  text "Bottom Paste" at 380.5,42 h3
  text "GBO" at 371.5,39 h3
  text "Bottom Overlay" at 380.5,39 h3
  text "GM1" at 371.5,33 h3
  text "Outline" at 380.5,33 h3
  text "GM7" at 371.5,30 h3
  text "PCB_Note" at 380.5,30 h3
  text "Board Name" at 348.5,14.5 h3
  text "Board Name" at 364.5,14.5 h3
  text "Author" at 348.5,11.5 h3
  text "Daniele Basile <asterix@develer.com>" at 364.5,11.5 h3
  text "Date" at 348.5,8.5 h3
  text "15/04/2016" at 364.5,8.5 h3
  text "Revision" at 348.5,5.5 h3
  text "A" at 364.5,5.5 h3
  text "A3" at 407,5.5 h3

## Text inside footprints (layer, text, board x,y; h text height)
U3: Note_top "1" at 8.754,12.542 h1